# Altium PCB DaughterBoards.PcbDoc (part 2 of 4)
Units mil, origin at the board's own origin, x right, y up, seen from the top; angles counter-clockwise.
Board outline 8080.87 x 6506.06 mil, 4 copper layers (Top Layer, Top, Mid-Layer 1, GND, Mid-Layer 2, VCC, Bottom Layer, Bottom), stack 18.2 mil thick; 508 components, 296 nets, 1635 pads, 376 vias.
Unrouted connection lines stored in the file: 28.
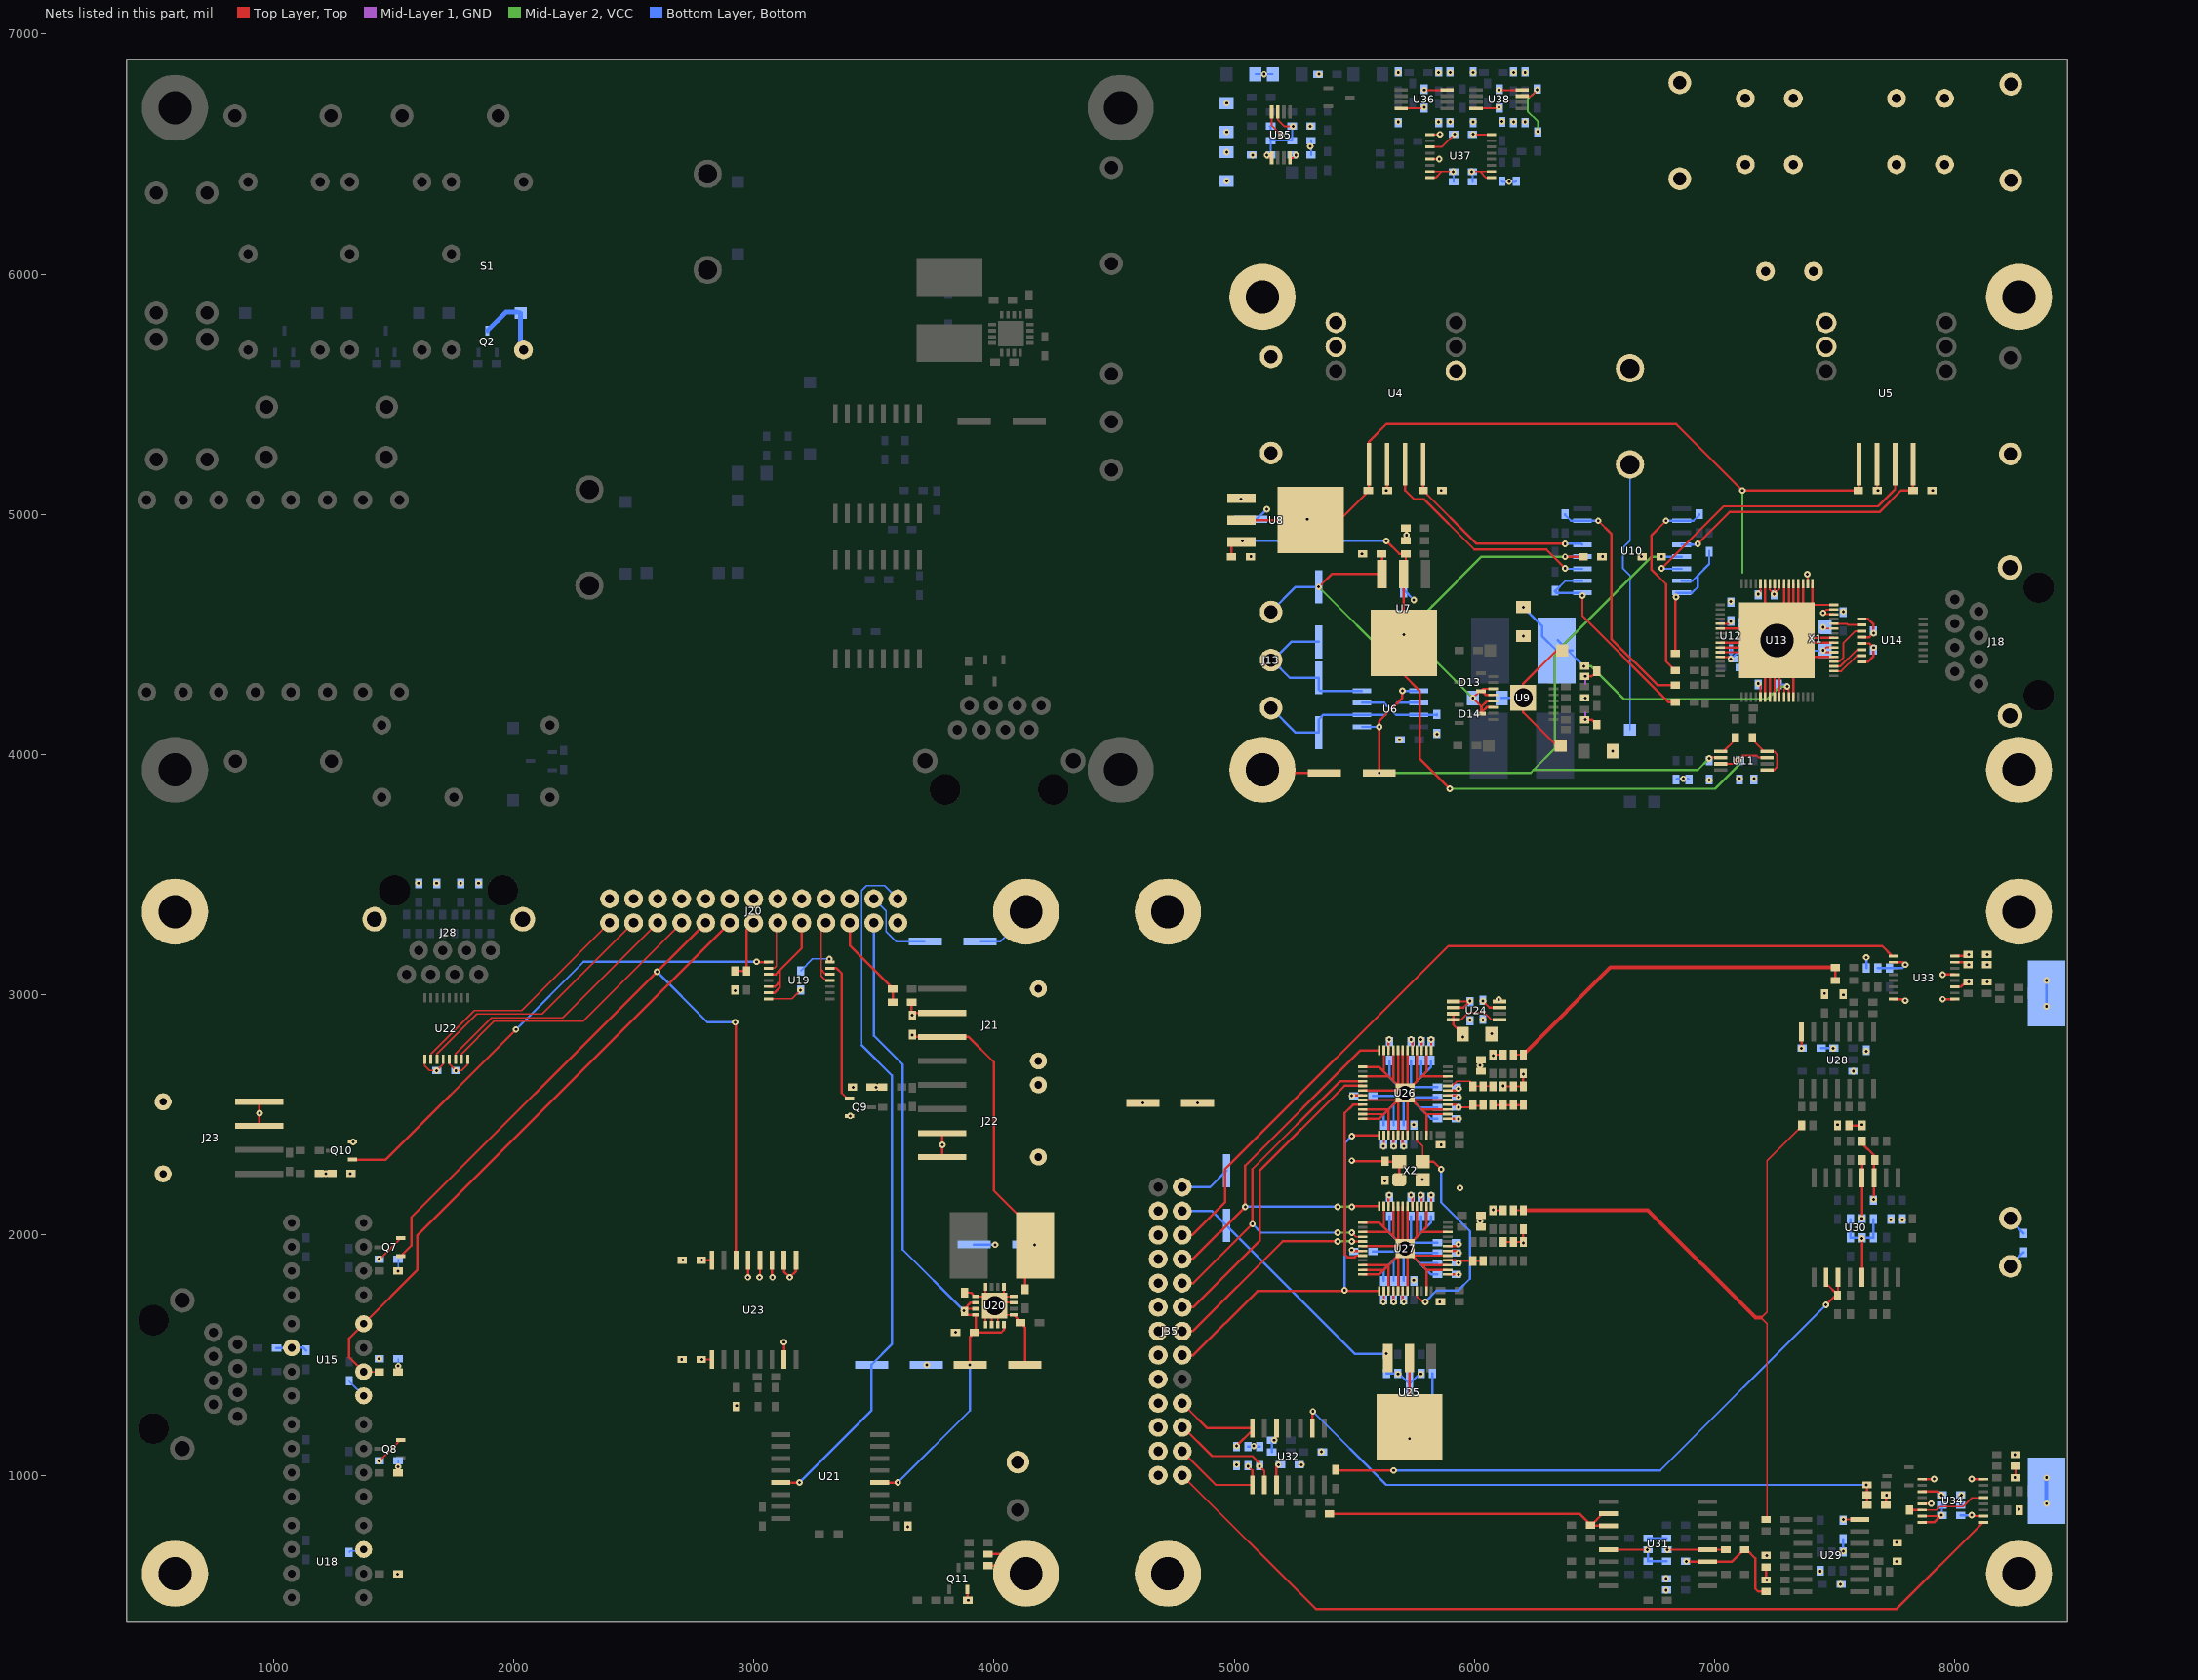
[diagram p4: the nets of this part, all layers, seen from the top]

## Via types
v1: diameter 27.56, hole 11.81, Top Layer, Top to Bottom Layer, Bottom, 373 vias
v2: diameter 98.43, hole 78.74, Top Layer, Top to Bottom Layer, Bottom, 2 vias
v3: diameter 157.48, hole 137.8, Top Layer, Top to Bottom Layer, Bottom, 1 vias

## Nets (pads, with @x,y where several pads share a name; then routed paths per layer and width w, separated by ;. In a path a pad name is that pad's centre, name@x,y a point inside that pad or via, vN(x,y) a via of type N, cw(c..) or ccw(c..) an arc to the next point about the centre after c; other vN are vias at no path point) (continued)
2_3.3V: C30.1 C48.2 C49.2 C55.2 C57.2 L2.1 R29.1 U13.10 U13.11 U13.22 U13.23 U13.30 U13.31 U13.34 U13.40 U13.41 U13.42 U14.1 U14.4 X1.1 X1.4 | length 2196.2
  Top Layer, Top w7.87: U13.42@7230.47,4712.22 7230.47,4685.53 v1(7248,4668) v1@7250.16,4670.16 ; U13.41@7250.16,4712.22 v1@7250.16,4670.16 ; U13.40@7269.84,4712.22 7269.84,4689.84 v1@7250.16,4670.16 ; U13.10@7289.53,4239.78 7289.53,4271.53 v1(7302,4284) 7309.21,4276.79 U13.11@7309.21,4239.78 ; v1(7386,4752) 7387.95,4750.05 U13.34@7387.95,4712.22 ; U13.22@7496.22,4426.79 7459.21,4426.79 v1(7452,4434) 7464.47,4446.47 U13.23@7496.22,4446.47 ; U13.30@7496.22,4584.27 7457.73,4584.27 v1(7452,4590) 7465.95,4603.95 U13.31@7496.22,4603.95
  Top Layer, Top w9.84: v1(6456,4368) R29.1@6459.37,4368 ; U14.4@7612.05,4488.8 7644.8,4488.8 v1(7662,4506) 7662,4542 7638.43,4565.57 U14.1@7612.05,4565.57
  Mid-Layer 2, VCC w9.84: v1(6456,4368) 6486,4368 6624,4230 7218,4230 7272,4284 v1(7302,4284)
  Bottom Layer, Bottom w7.87: C48.2@7248,4665.37 v1(7248,4668) ; C49.2@7266,4292.63 7293.37,4292.63 v1(7302,4284) ; C57.2@7383.37,4380 7383.37,4419.37 7386,4422 X1.1@7384.6,4432.79 7450.79,4432.79 v1(7452,4434) 7453.21,4432.79 X1.4@7459.4,4432.79
  Bottom Layer, Bottom w9.84: v1(6204,4614) 6281.8,4536.2 6281.8,4494 L2.1@6341.8,4434 L2.1@6390,4434 ; L2.1@6348,4476 L2.1@6390,4434 ; L2.1@6408,4434 L2.1@6390,4434 ; v1(6456,4368) L2.1@6390,4434 ; v1(7662,4506) C55.2@7662,4515.37
2_5V: C17.1 C19.1 C29.1 C44.2 C51.2 C52.2 C53.2 C54.2 U4.10 U5.10 U8.2 U8.4 U12.1 U12.2 U13.5 U13.44 U13.53 U13.60 | length 3916.6
  Top Layer, Top w7.87: U13.60@7023.78,4407.1 7058.9,4407.1 v1(7068,4398) ; U13.53@7023.78,4544.9 7058.9,4544.9 v1(7068,4554) ; v1(7182,4296) 7191.1,4286.9 U13.5@7191.1,4239.78 ; v1(7182,4668) 7191.1,4677.1 U13.44@7191.1,4712.22
  Top Layer, Top w9.84: U8.2@5031.17,4976.54 U8.4@5307.46,4976.54 ; v1(5304,4980) U8.4@5307.46,4976.54 ; U4.10@5561.4,5209.42 5561.4,5100.6 C17.1@5562,5100 ; C19.1@7598.63,5100 C19.1@7596,5100 ; U5.10@7601.4,5209.42 7601.4,5105.4 C19.1@7596,5100 ; U8.4@5307.46,4976.54 U8.4@5318.57,4976.54 5360.54,4976.54 5364,4980 5442,4980 5556,5094 C17.1@5558.63,5100 C17.1@5562,5100 ; C17.1@5562,5100 5562,5304 5634,5376 6840,5376 v1(7116,5100) C19.1@7596,5100
  Mid-Layer 2, VCC w7.87: 7116,4758 v1(7116,5100)
  Bottom Layer, Bottom w7.87: v1(7068,4554) C52.2@7068,4556.63 ; C53.2@7182,4665.37 v1(7182,4668)
  Bottom Layer, Bottom w9.84: C29.1@5298.17,4980 v1(5304,4980) ; U12.2@7068,4438.88 v1(7068,4398) ; C54.2@7076.63,4398 v1(7068,4398) ; C44.2@7152,4454.63 7118.63,4454.63 7104,4440 U12.1@7105.4,4438.88 7105.4,4435.4 v1(7068,4398) ; C51.2@7182,4292.63 v1(7182,4296)
2_10V: C25.1 C27.1 C38.1 C42.1 R27.2 U7.2 U7.4 U8.3 U10.4 U11.3 U11.7 | length 4586.8
  Top Layer, Top w7.87: U11.7@7026.07,3961.59 7081.59,3961.59 v1(7098,3978) 7116,3996 7176,3996 7184.82,3987.18 U11.3@7218,3987.18
  Top Layer, Top w9.84: C27.1@4988.63,4824 4988.63,4880.63 4998,4890 U8.3@5031.17,4885.98 v1(5034,4890) ; v1(5634,4890) 5688,4836 R27.2@5714.63,4836 5714.63,4760.63 U7.2@5706,4752 v1(5706,4500) ; v1(5898,3858) 5772,3984 5772,4266 U7.4@5706,4332 ; v1(6378,4824) C38.1@6452.63,4824 ; U7.4@5706,4332 U7.4@5706,4434 ; U7.4@5706,4332 U7.4@5706,4434 ; U7.4@5706,4332 U7.4@5706,4434 ; U7.4@5706,4434 U7.4@5706,4464.6 ; U7.4@5706,4434 U7.4@5706,4464.6 ; U7.4@5706,4464.6 v1(5706,4500) ; U7.4@5706,4464.6 v1(5706,4500)
  Mid-Layer 2, VCC w9.84: v1(5706,4500) 5826,4620 6030,4824 v1(6378,4824) ; v1(5898,3858) 6852,3858 7002,3858 7098,3954 v1(7098,3978)
  Bottom Layer, Bottom w7.87: v1(7098,3978) 7104,3972 C42.1@7104,3975.37
  Bottom Layer, Bottom w9.84: v1(5034,4890) v1(5634,4890) ; C25.1@5706,4493.83 v1(5706,4500) ; v1(6378,4824) U10.4@6450,4824
2_12V: C20.2 C22.1 C33.1 D13.1 D14.3 J13.1 U7.3 U9.3 U9.4 U9.5 U9.6 | length 1842.6
  Top Layer, Top w9.84: v1(5352,4698) 5406,4752 U7.3@5615.45,4752 5615.45,4830.55 5610,4836 C20.2@5613.37,4836 ; D14.3@6030,4170 D14.3@6030,4176 ; U9.6@6078.02,4197.61 6051.61,4197.61 D14.3@6030,4176 ; U9.5@6078.02,4223.2 6053.2,4223.2 6030,4200 D14.3@6030,4176 ; U9.4@6078.02,4248.8 6047.2,4248.8 D13.1@6030,4266 ; U9.3@6078.02,4274.39 6038.39,4274.39 D13.1@6030,4266 ; D14.3@6027.53,4173.53 6027.53,4202.47 v1(5994,4236) 6022.5,4264.5 D13.1@6027.47,4264.5 D13.1@6030,4266 ; D14.3@6027.53,4173.53 D14.3@6030,4176 ; D14.3@6027.53,4173.53 6024,4170 D14.3@6027.53,4170 D14.3@6027.53,4173.53
  Mid-Layer 2, VCC w9.84: v1(5352,4698) 5664,4386 5700,4386 5844,4386 v1(5994,4236)
  Bottom Layer, Bottom w9.84: J13.1@5154,4594 5154,4596 5256.17,4698.17 C22.1@5352,4698.17 v1(5352,4698)
2_25MHZ: U13.27 X1.3 | length 53.7
  Top Layer, Top w7.87: v1(7452,4530) 7456.79,4525.21 U13.27@7496.22,4525.21
  Bottom Layer, Bottom w7.87: v1(7452,4530) X1.3@7459.4,4531.21
2_-5V: C28.2 C39.1 C43.1 U6.1 U6.5 U10.13 U11.6 | length 3198.9
  Top Layer, Top w7.87: v1(6978,3984) 6981.18,3987.18 U11.6@7026.07,3987.18
  Top Layer, Top w9.84: v1(5604,3924) C28.2@5604.17,3924 5604.17,4115.83 v1(5604,4116) 5604,4140 5700,4236 v1(5700,4266) ; C39.1@6777.37,4824 v1(6780,4824)
  Mid-Layer 2, VCC w9.84: v1(5604,3924) 6234,3924 6246,3936 ; v1(6780,4824) 6738,4824 6336,4422 6336,4026 6246,3936 ; v1(6978,3984) 6930,3936 6852,3936 6246,3936
  Bottom Layer, Bottom w7.87: C43.1@6978,3975.37 v1(6978,3984)
  Bottom Layer, Bottom w9.84: U6.1@5532,4116 v1(5604,4116) ; v1(5700,4266) U6.5@5768.22,4266 ; v1(6780,4824) U10.13@6863.39,4824
2_-12V: C21.2 C23.2 J13.3 U6.2 U6.3 U6.6 U6.7 | length 1076.6
  Bottom Layer, Bottom w9.84: J13.3@5154,4194 5256.17,4091.83 C23.2@5352,4091.83 5352,4146 5372,4166 U6.2@5532,4166 5630,4166 5652,4188 ; U6.3@5532,4216 5624,4216 5652,4188 ; U6.6@5768.22,4216 5680,4216 5652,4188 ; C21.2@5844,4167.37 5844,4164 5842,4166 U6.7@5768.22,4166 5674,4166 5652,4188
2_ADC0: U13.20 U14.3 | length 203.6
  Top Layer, Top w7.87: U13.20@7496.22,4387.42 7519.42,4387.42 7536,4404 7536,4464 7586.39,4514.39 U14.3@7612.05,4514.39
2_ADC1: U13.19 U14.6 | length 144.8
  Top Layer, Top w7.87: U13.19@7496.22,4367.73 7523.73,4367.73 7593.61,4437.61 U14.6@7612.05,4437.61
2_ADC2: U13.18 U14.7 | length 142.3
  Top Layer, Top w7.87: U13.18@7496.22,4348.05 7528.05,4348.05 7592.02,4412.02 U14.7@7612.05,4412.02
2_CLK: U13.28 U14.2 | length 117.9
  Top Layer, Top w7.87: U13.28@7496.22,4544.9 7551.1,4544.9 7556.02,4539.98 U14.2@7612.05,4539.98
2_GND: C15.2 C16.2 C17.2 C18.2 C19.2 C20.1 C21.1 C22.2 C23.1 C24.1 C25.2 C26.2 C27.2 C28.1 C29.2 C30.2 C32.2 C33.2 C34.2 C35.2 C37.2 C38.2 C39.2 C40.1 C41.1 C42.2 C43.2 C44.1 C47.1 C48.1 C49.1 C50.1 C51.1 C52.1 C53.1 C54.1 C55.1 C57.1 D11.2 D12.1 D15.1 J11.1 J12.2 J13.2 J14.1 J15.1 J16.1 J17.1 J18.9 J18.10 R28.1 R30.2 R33.2 R42.2 U4.9 U5.9 U6.4 U8.1 U9.17 U12.5 U13.6 U13.7 U13.8 U13.9 U13.12 U13.21 U13.24 U13.25 U13.32 U13.33 U13.35 U13.36 U13.37 U13.38 U13.39 U13.43 U13.54 U13.57 U13.58 U13.59 U13.65 U14.5 U14.8 X1.2 | length 7540.7
  Top Layer, Top w9.84: v1(5028,5064) 5031.09,5067.09 U8.1@5031.17,5067.09 ; C27.2@5067.37,4824 v1(5070,4824) ; J15.1@5118.11,3937.01 5172,3924 C28.1@5375.83,3924 ; v1(5532,4836) C20.1@5534.63,4836 ; U4.9@5636.47,5209.42 5636.47,5102.47 v1(5634,5100) C17.2@5637.37,5100 ; R28.1@5714.63,4890 5718,4893.37 v1(5718,4914) 5718,4940.63 C24.1@5714.63,4944 ; v1(5862,5100) C16.2@5865.37,5100 ; D15.1@6360,4038 6342,4038 6204,4176 U9.17@6204,4236 6204,4296 6342,4434 D12.1@6366,4434 ; R33.2@6459.37,4146 v1(6462,4146) 6488.63,4146 C35.2@6510,4124.63 ; C34.2@6459.37,4236 v1(6462,4236) ; R30.2@6459.37,4326 v1(6462,4326) 6488.63,4326 C32.2@6510,4347.37 ; C38.2@6531.37,4824 v1(6534,4824) ; v1(6696,4824) C39.2@6698.63,4824 ; U13.59@7023.78,4426.79 U13.65@7210.79,4426.79 ; U13.58@7023.78,4446.47 U13.65@7230.47,4446.47 ; U13.57@7023.78,4466.16 U13.65@7250.16,4466.16 ; U13.54@7023.78,4525.21 U13.65@7210.79,4525.21 ; U13.6@7210.79,4239.78 U13.65@7210.79,4426.79 ; U13.43@7210.79,4712.22 U13.65@7210.79,4525.21 ; U13.7@7230.47,4239.78 U13.65@7230.47,4446.47 ; U13.8@7250.16,4239.78 U13.65@7250.16,4466.16 ; U13.9@7269.84,4239.78 U13.65@7269.84,4466.16 ; U13.39@7289.53,4712.22 U13.65@7289.53,4505.53 ; U13.38@7309.21,4712.22 U13.65@7309.21,4525.21 ; U13.12@7328.9,4239.78 U13.65@7328.9,4407.1 ; U13.37@7328.9,4712.22 U13.65@7328.9,4544.9 ; U13.36@7348.58,4712.22 U13.65@7348.58,4564.58 ; U13.35@7368.27,4712.22 U13.65@7368.27,4584.27 ; U13.33@7407.64,4712.22 U13.65@7407.64,4623.64 ; U13.21@7496.22,4407.1 U13.65@7328.9,4407.1 ; U13.24@7496.22,4466.16 U13.65@7269.84,4466.16 ; U13.25@7496.22,4485.84 U13.65@7269.84,4485.84 ; U13.32@7496.22,4623.64 U13.65@7407.64,4623.64 ; U14.8@7612.05,4386.43 7638.43,4386.43 7662,4410 v1(7662,4446) 7644.8,4463.2 U14.5@7612.05,4463.2 ; U5.9@7676.47,5209.42 7676.47,5103.53 v1(7680,5100) C19.2@7677.37,5100 ; C18.2@7905.37,5100 v1(7908,5100) ; U13.65@7210.79,4426.79 U13.65@7230.47,4446.47 ; U13.65@7210.79,4525.21 v3(7260,4476) ; U13.65@7230.47,4446.47 U13.65@7250.16,4466.16 ; U13.65@7250.16,4466.16 v3(7260,4476) ; v3(7260,4476) U13.65@7269.84,4466.16 ; v3(7260,4476) U13.65@7269.84,4485.84 ; U13.65@7269.84,4466.16 U13.65@7328.9,4407.1 ; U13.65@7269.84,4485.84 U13.65@7289.53,4505.53 ; U13.65@7289.53,4505.53 U13.65@7309.21,4525.21 ; U13.65@7309.21,4525.21 U13.65@7328.9,4544.9 ; U13.65@7328.9,4544.9 U13.65@7348.58,4564.58 ; U13.65@7348.58,4564.58 U13.65@7368.27,4584.27 ; U13.65@7368.27,4584.27 U13.65@7407.64,4623.64
  Mid-Layer 1, GND w9.84: v1(6462,4146) 6462,4176 ; 6462,4296 v1(6462,4326)
  Bottom Layer, Bottom w7.87: C41.1@6840,3896.63 6843.37,3900 v1(6870,3900) 6890.63,3900 R42.2@6894,3896.63 ; v1(6978,3894) C43.2@6978,3896.63 ; C52.1@7068,4635.37 v1(7068,4638) ; C42.2@7104,3896.63 v1(7104,3900) ; U12.5@7105.4,4549.12 7138.88,4549.12 C44.1@7152,4536 ; C47.1@7107.37,4362 7146,4362 C51.1@7170,4386 ; C44.1@7152,4533.37 C44.1@7152,4536 ; C54.1@7155.37,4398 7158,4398 C51.1@7170,4386 ; C40.1@7164,3896.63 v1(7164,3900) ; C51.1@7182,4371.37 7182,4386 7176,4392 ; C53.1@7182,4586.63 7182,4554 7200,4536 ; C48.1@7248,4586.63 v3@7248,4488 ; C49.1@7266,4371.37 v3@7266,4418.63 ; C57.1@7304.63,4380 v3@7266,4418.63 ; X1.2@7384.6,4531.21 7315.21,4531.21 v3(7260,4476) ; C50.1@7536,4593.37 v1(7536,4596) ; C44.1@7152,4536 7200,4536 ; C51.1@7170,4386 7176,4392 ; 7176,4392 v3(7260,4476) ; 7200,4536 v3@7248,4488 ; v3@7248,4488 v3(7260,4476) ; v3(7260,4476) 7266,4470 v3@7266,4418.63 ; v3(7260,4476) 7260,4424.63 v3@7266,4418.63
  Bottom Layer, Bottom w9.84: C29.2@5069.83,4980 5094,4980 v1(5136,5022) ; J13.2@5154,4386 J13.2@5160,4392 ; J13.2@5154,4394 J13.2@5160,4392 ; C22.2@5352,4469.83 5237.83,4469.83 J13.2@5160,4392 ; U6.4@5532,4266 5358,4266 5352,4272 C23.1@5352,4320.17 5231.83,4320.17 J13.2@5160,4392 ; v1(5688,4062) C26.2@5690.63,4062 ; C25.2@5706,4722.17 5706,4686 v1(5748,4644) ; v1(5844,4086) C21.1@5844,4088.63 ; C33.2@6114,4236 U9.17@6204,4236 ; C55.1@7662,4436.63 v1(7662,4446)
  other v1: 6576,4014 6204,4494
2_I1+: R35.2 R43.2 U10.1 U10.2 | length 883.1
  Top Layer, Top w9.84: v1(6450,4662) 6450,4578 6810,4218 R43.2@6836.63,4218
  Bottom Layer, Bottom w9.84: R35.2@6336,4682.63 R35.2@6336,4680 ; v1(6450,4662) U10.1@6450,4674 6342,4674 R35.2@6336,4680 ; U10.2@6450,4724 6380,4724 R35.2@6336,4680
2_I1-: R36.1 R44.2 U10.7 | length 1011.8
  Top Layer, Top w9.84: v1(6516,4974) 6570,4920 6570,4482 6762,4290 R44.2@6836.63,4290
  Bottom Layer, Bottom w9.84: R36.1@6378,5001.37 6378,4998 6402,4974 U10.7@6450,4974 v1(6516,4974)
2_I2+: R38.2 R47.2 U10.15 U10.16 | length 598.9
  Top Layer, Top w9.84: R47.2@6836.63,4422 6836.63,4652.63 v1(6840,4656)
  Bottom Layer, Bottom w9.84: v1(6840,4656) 6840,4674 U10.16@6863.39,4674 6906,4674 6930,4698 6930,4746 ; U10.15@6863.39,4724 6908,4724 6930,4746 ; R38.2@6978,4848 R38.2@6978,4844.63 6978,4794 6930,4746
2_I2-: R39.1 R48.2 U10.10 | length 841
  Top Layer, Top w9.84: v1(6798,4974) 6738,4914 6738,4770 6798,4710 6798,4388.63 R48.2@6836.63,4350
  Bottom Layer, Bottom w9.84: v1(6798,4974) U10.10@6863.39,4974 6912,4974 6936,4998 R39.1@6936,5001.37
2_LEM1+: U4.8 U10.3 | length 982.6
  Top Layer, Top w9.84: U4.8@5711.53,5209.42 5711.53,5100.47 5748,5064 5790,5064 6000,4854 6300,4854 v1(6378,4776)
  Bottom Layer, Bottom w9.84: v1(6378,4776) 6380,4774 U10.3@6450,4774
2_LEM1-: C16.1 U4.7 U10.5 | length 871.2
  Top Layer, Top w9.84: U4.7@5786.6,5209.42 5786.6,5103.4 5790,5100 C16.1@5786.63,5100 6008.63,4878 v1(6378,4878)
  Bottom Layer, Bottom w9.84: v1(6378,4878) 6446,4878 U10.5@6450,4874
2_LEM2+: U5.8 U10.14 | length 1296.1
  Top Layer, Top w9.84: v1(6780,4776) 7038,5034 7680,5034 7751.53,5105.53 U5.8@7751.53,5209.42
  Bottom Layer, Bottom w9.84: v1(6780,4776) 6782,4774 U10.14@6863.39,4774
2_LEM2-: C18.1 U5.7 U10.12 | length 1171.1
  Top Layer, Top w9.84: v1(6930,4878) 7062,5010 7686,5010 7776,5100 C18.1@7826.63,5100 7830,5100 7826.6,5103.4 U5.7@7826.6,5209.42
  Bottom Layer, Bottom w9.84: U10.12@6863.39,4874 6926,4874 v1(6930,4878)
2_V1: C15.1 D11.1 R40.2 U4.6 U5.2 U5.3 | length 1128.9
  Bottom Layer, Bottom w7.87: R40.2@6648,4104 6648,4746 6618,4776 6618,4860 6648,4890 C15.1@6648,5208
2_V1+: R45.2 U11.5 | length 89
  Top Layer, Top w7.87: U11.5@7026.07,4012.77 7036.77,4012.77 7086,4062 R45.2@7086,4070.63
2_V1-: R46.2 U11.1 U11.4 | length 236.5
  Top Layer, Top w7.87: R46.2@7158,4070.63 7158,4062 7207.23,4012.77 U11.4@7218,4012.77 7249.23,4012.77 7260,4002 7260,3948 7248,3936 U11.1@7218,3936
3_3.3V: C58.1 C59.1 C60.1 C62.1 C63.1 C66.1 C67.1 C78.1 J20.3 R59.1 R60.1 R61.1 R62.1 R66.1 R68.1 U19.14 U22.13 U22.16 | length 894.3
  Top Layer, Top w5.98: R61.1@1519.37,1010 1520,1010.63 v1(1520,1035) ; R60.1@1519.37,1430 1520,1430.63 v1(1520,1455) ; R59.1@1519.37,1850 v1(1520,1850) ; U22.13@1732.8,2732.05 1732.8,2712.2 v1(1760,2685) 1785,2685 1809.57,2709.57 U22.16@1809.57,2732.05 ; v1(3315,3150) 3317.95,3147.05 U19.14@3317.95,3136.77
  Top Layer, Top w9.84: R68.1@1191.37,2256 v1(1218,2256) C66.1@1244.63,2256 ; v1(1518,588) 1518,588.63 R62.1@1519.37,590 ; C67.1@3489.37,2616 v1(3510,2616) R66.1@3536.63,2616
  Bottom Layer, Bottom w5.98: C59.1@1519.37,1060 1520,1059.37 v1(1520,1035) ; C58.1@1519.37,1485 1520,1484.37 v1(1520,1455) ; C60.1@1519.37,1900 1520,1899.37 v1(1520,1850) ; C78.1@1759.37,2685 v1(1760,2685) ; C63.1@3195,3099.37 3195,3100 3245,3150 v1(3315,3150) ; J20.3@3500,3400 3550,3350 3550,3265 3593,3222 C62.1@3713.83,3222
3_5V: C65.1 C71.1 C81.2 C82.2 J21.3 L4.2 R71.2 U23.1 U23.11 U23.13 U23.16 | length 1682.3
  Top Layer, Top w9.84: C82.2@2781.37,1482 v1(2784,1482) U23.1@2826,1482 ; C81.2@2781.37,1896 v1(2784,1896) 2784.61,1895.39 U23.16@2826,1895.39 ; v1(2976,1824) U23.13@2976,1895.39 ; U23.11@3076,1895.39 3076,1826 v1(3078,1824) ; C65.1@3660,2834.63 v1(3660,2832) 3667,2825 J21.3@3785,2825 3895,2825 4000,2720 4000,2185 4170,2015 v1(4170,1960) ; R71.2@4130,1774.37 4130,1920 v1(4170,1960) ; L4.2@4171.13,1957.93 v1(4170,1960)
  Bottom Layer, Bottom w9.84: C71.1@4145.17,1961 4169,1961 v1(4170,1960)
3_12V: C64.1 C68.2 C69.2 J20.4 U20.2 U20.3 U20.4 U20.8 U21.4 | length 3018.2
  Top Layer, Top w5.98: v1(3875,1685) C69.2@3878,1681.63
  Top Layer, Top w9.84: U21.4@3525,970 v1(3600,970) ; C69.2@3875,1670 C69.2@3875,1675 ; C69.2@3878,1681.63 C69.2@3876.56,1678.44 ; v1(3900,1460) C64.1@3900.83,1460 3900.83,1575.83 C68.2@3920,1595 ; C68.2@3919.37,1595 C68.2@3920,1595 ; U20.3@3924.5,1693.39 C69.2@3878.39,1693.39 ; U20.2@3924.5,1718.98 3903.98,1718.98 C69.2@3878.39,1693.39 ; U20.8@4041.63,1627.44 4041.63,1606.63 4030,1595 C68.2@3925,1595 ; C69.2@3875,1675 C69.2@3876.56,1678.44 ; C69.2@3875,1675 C69.2@3875,1680 ; C69.2@3875,1680 v1(3875,1685) 3875,1690 C69.2@3878.39,1693.39 ; C69.2@3875,1680 C69.2@3876.56,1678.44 ; C69.2@3876.56,1678.44 3887.2,1667.8 U20.4@3924.5,1667.8 3924.5,1595.5 C68.2@3925,1595 ; C68.2@3920,1595 C68.2@3925,1595
  Bottom Layer, Bottom w9.84: J20.4@3500,3300 3500,2830 3620,2710 3620,1940 v1(3875,1685) ; v1(3600,970) 3900,1270 v1(3900,1460)
3_-12V: C61.2 J20.1 U21.13 | length 2936.9
  Top Layer, Top w9.84: U21.13@3111.61,970 v1(3190,970)
  Bottom Layer, Bottom w5.98: 3450,2790 3450,3435 3470,3455 3545,3455 J20.1@3600,3400
  Bottom Layer, Bottom w9.84: v1(3190,970) 3490.83,1270.83 C61.2@3490.83,1460 3490,1460 3575,1545 3575,2665 3450,2790
3_ADC0_0: J20.24 U22.11 | length 1067.1
  Top Layer, Top w5.98: U22.11@1681.61,2732.05 1681.61,2755 1846.61,2920 2120,2920 J20.24@2500,3300
3_ADC0_1: J20.22 U22.14 | length 1090.3
  Top Layer, Top w5.98: U22.14@1758.39,2732.05 1758.39,2755 1908.39,2905 2205,2905 J20.22@2600,3300
3_ADC0_2: J20.20 U22.15 | length 1164.7
  Top Layer, Top w5.98: U22.15@1783.98,2732.05 1783.98,2755 1918.98,2890 2290,2890 J20.20@2700,3300
3_ADC0_CLK: J20.26 U22.10 | length 992.7
  Top Layer, Top w5.98: U22.10@1656.02,2732.05 1656.02,2755 1836.02,2935 2035,2935 J20.26@2400,3300
3_FULLBRIDGE: J20.12 U19.2 | length 218.7
  Top Layer, Top w5.98: U19.2@3062.05,3111.18 3086.18,3111.18 3095,3120 3095,3295 J20.12@3100,3300
3_GND: C58.2 C59.2 C60.2 C61.1 C62.2 C63.2 C64.2 C65.2 C66.2 C67.2 C68.1 C69.1 C71.2 C72.2 C73.2 C74.2 C75.2 C76.2 C77.2 C78.2 C80.2 C81.1 C82.1 J20.2 J20.5 J20.7 J20.9 J20.11 J20.13 J20.15 J20.17 J20.19 J20.21 J20.23 J20.25 J21.2 J21.5 J21.6 J22.3 J22.4 J22.5 J22.6 J23.3 J23.4 J23.5 J23.6 J24.1 J25.1 J26.1 J27.1 J28.9 J28.10 J29.2 Q7.2 Q8.2 Q9.2 Q10.2 Q11.2 R55.1 R58.1 R70.1 R72.1 R77.1 R85.1 R199.1 U15.5 U18.3 U19.7 U20.1 U20.5 U20.6 U20.7 U20.9 U20.11 U20.12 U20.13 U20.16 U20.17 U22.9 U22.12 U23.7 U23.9 U23.10 U23.12 | length 3074
  Top Layer, Top w5.98: v1(1440,1060) 1442.97,1060 Q8.2@1530.47,1147.5 ; v1(1440,1900) 1442.97,1900 Q7.2@1530.47,1987.5 ; U22.9@1630.43,2732.05 1630.43,2704.57 1650,2685 v1(1680,2685) 1707.2,2712.2 U22.12@1707.2,2732.05 ; U19.7@3062.05,2983.23 3158.23,2983.23 v1(3195,3020)
  Top Layer, Top w7.87: U20.1@3924.5,1744.57 U20.17@3964.86,1744.57 ; U20.5@3964.86,1627.44 3964.86,1667.8 U20.17@3990.45,1693.39 ; U20.16@3964.86,1784.92 U20.17@3964.86,1744.57 ; U20.6@3990.45,1627.44 U20.17@3990.45,1693.39 ; U20.7@4016.04,1627.44 U20.17@4016.04,1693.39 ; U20.13@4041.63,1784.92 U20.17@4041.63,1744.57 ; U20.9@4081.98,1667.8 4041.63,1667.8 U20.17@4016.04,1693.39 ; U20.11@4081.98,1718.98 U20.17@4016.04,1718.98 ; U20.12@4081.98,1744.57 U20.17@4041.63,1744.57 ; U20.17@3964.86,1744.57 v2(4003.24,1706.18) ; U20.17@3990.45,1693.39 v2(4003.24,1706.18) ; v2(4003.24,1706.18) U20.17@4016.04,1718.98 ; v2(4003.24,1706.18) U20.17@4016.04,1693.39 ; U20.17@4016.04,1718.98 U20.17@4041.63,1744.57
  Top Layer, Top w9.84: J23.3@940.98,2455 940.98,2506.98 v1(942,2508) 940.98,2509.02 J23.4@940.98,2555 ; v1(1320,2256) C66.2@1323.37,2256 ; Q10.2@1329.47,2389.5 1330.5,2389.5 v1(1332,2388) ; v1(2700,1482) C82.1@2702.63,1482 ; C81.1@2702.63,1896 v1(2706,1896) ; v1(2922,3018) R199.1@2922,3020.63 ; C80.2@2928,1286.63 v1(2928,1290) ; v1(3024,1824) 3026,1826 U23.12@3026,1895.39 ; U23.7@3126,1482 v1(3126,1554) ; U23.10@3126,1895.39 3126,1848 v1(3150,1824) 3176,1850 U23.9@3176,1895.39 ; Q9.2@3398.53,2494.5 3400.5,2494.5 v1(3402,2496) ; C67.2@3410.63,2616 v1(3414,2616) ; v1(3642,786) R85.1@3642,788.63 ; R70.1@3657.37,2970 3657.37,2918.63 v1(3660,2916) ; C65.2@3660,2913.37 v1(3660,2916) ; J22.4@3785,2325 3785,2375 v1(3786,2376) 3785,2377 J22.3@3785,2425 ; J21.2@3785,2925 3669,2925 v1(3660,2916) ; v1(3840,1595) C68.1@3840.63,1595 ; C69.1@3878,1760.37 3904.63,1760.37 3920,1745 U20.1@3924.5,1744.57 ; Q11.2@3889.5,524.53 3889.5,484.5 v1(3894,480) C73.2@3891.37,480 ; C75.2@3975.37,624 J27.1@4092,624 ; R77.1@3975.37,672 4044,672 J27.1@4092,624 ; U20.9@4081.98,1667.8 4082.2,1667.8 4110,1640 R72.1@4110.63,1635 4110,1635 4129.17,1615.83 C64.2@4129.17,1460 ; J27.1@4133.86,590.55 4110,606 J27.1@4092,624
  Bottom Layer, Bottom w5.98: R58.1@1315,679.37 1320.63,685 1375,685 U18.3@1375.83,690 ; R55.1@1316,1393.63 1320,1385 1322,1385 U15.5@1376,1331 ; v1(1440,1060) C59.2@1440.63,1060 ; v1(1440,1485) C58.2@1440.63,1485 ; v1(1440,1900) C60.2@1440.63,1900 ; C77.2@1605,3464.37 v1(1605,3465) ; v1(1680,2685) C78.2@1680.63,2685 ; C76.2@1680,3464.37 v1(1680,3465) ; C74.2@1780,3464.37 v1(1780,3465) ; C72.2@1855,3464.37 v1(1855,3465) ; v1(3195,3020) C63.2@3195,3020.63 ; C62.2@3942.17,3222 4027,3222 4110,3305 J26.1@4133.86,3346.46 ; U18.3@1375.83,690 1375,690 U18.3@1376,691 U18.3@1375.83,690
  Bottom Layer, Bottom w9.84: v1(1320,2256) v1@1326,2256 ; C61.1@3719.17,1460 v1(3720,1460) ; C71.2@3916.83,1961 4004,1961 v1(4005,1960)
3_RX: J20.6 R65.1 R70.2 | length 407.2
  Top Layer, Top w9.84: J20.6@3400,3300 3400,3206 3576,3030 R65.1@3578.63,3024 3576,3024 3578.63,3021.37 R70.2@3578.63,2970
3_S1: Q10.1 U19.1 | length 2074.2
  Top Layer, Top w9.84: Q10.1@1329.47,2314.5 1468.5,2314.5 v1(2010,2856) ; v1(3012,3138) 3013.23,3136.77 U19.1@3062.05,3136.77
  Bottom Layer, Bottom w9.84: v1(2010,2856) 2292,3138 v1(3012,3138)
3_SOFTSTART: J20.10 U19.3 U19.5 U19.6 | length 521.8
  Top Layer, Top w5.98: U19.3@3062.05,3085.59 3090.59,3085.59
  Top Layer, Top w9.84: U19.6@3062.05,3008.82 3086.82,3008.82 3108,3030 3108,3054 ; U19.5@3062.05,3034.41 3088.41,3034.41 3108,3054 ; U19.3@3062.05,3085.59 3090.59,3085.59 ; J20.10@3200,3300 3200,3195 3090.59,3085.59 ; 3090.59,3085.59 3091.59,3085.59 3108,3102 3108,3054
3_TX: J20.8 U19.11 U19.12 | length 320.5
  Top Layer, Top w5.98: J20.8@3300,3300 3280,3280 3280,3105 ; U19.11@3317.95,3060 3300,3060 3280,3080 3280,3105 ; U19.12@3317.95,3085.59 3299.41,3085.59 3280,3105
3_USB: Q9.1 U19.13 | length 596.7
  Top Layer, Top w9.84: U19.13@3317.95,3111.18 3344.82,3111.18 3366,3090 3366,2592 3388.5,2569.5 Q9.1@3398.53,2569.5
3_VBUS: J20.16 R60.2 U15.6 U15.8 | length 2615.5
  Top Layer, Top w5.98: U15.6@1376,1431 1390,1430 R60.2@1440.63,1430
  Top Layer, Top w9.84: U15.6@1376,1431 1315,1492 1315,1570 U15.8@1376,1631 1600,1855 1600,2000 J20.16@2900,3300
3_VCLK: J20.18 Q7.1 U23.14 | length 3318
  Top Layer, Top w9.84: Q7.1@1530.47,1912.5 1575,1957.03 1575,2075 v1@2597,3097 ; v1(2598,3096) v1@2597,3097 ; J20.18@2800,3300 v1@2597,3097 ; v1(2922,2886) 2926,2882 U23.14@2926,1895.39
  Bottom Layer, Bottom w9.84: v1(2598,3096) 2808,2886 v1(2922,2886)
3_VREF: J20.14 R198.1 R199.2 | length 262.1
  Top Layer, Top w9.84: R199.2@2922,3099.37 2967.37,3099.37 R198.1@2970,3102 ; R198.1@2970,3099.37 R198.1@2970,3102 ; J20.14@3000,3300 2970,3270 R198.1@2970,3102
4_1.8V: C88.2 C90.2 C91.2 C92.2 C93.2 C94.2 C95.2 C96.2 C97.2 C98.2 C99.2 C100.2 C102.2 C103.2 C104.2 C105.2 C106.2 C107.2 C108.2 C109.2 C110.2 C111.2 C112.2 C114.2 C115.2 C117.2 C118.2 R96.2 R97.2 R98.2 R99.2 R100.2 R101.2 R102.2 R103.2 U24.1 U24.7 U24.8 U26.2 U26.4 U26.6 U26.13 U26.16 U26.18 U26.19 U26.25 U26.27 U26.29 U26.34 U27.2 U27.4 U27.6 U27.13 U27.16 U27.18 U27.19 U27.25 U27.27 U27.29 U27.34 | length 1899.3
  Top Layer, Top w6: U24.8@5912.84,2895.91 5927.72,2896.17 5945.72,2896.17 5975.72,2926.17 6041.72,2926.17 6071.98,2895.91 U24.1@6104.77,2895.91 ; R100.2@6078,2103.37 v1(6078,2106)
  Top Layer, Top w9.84: v1(5622,1722) 5623.42,1723.42 U27.2@5623.42,1766.83 ; v1(5622,2370) 5623.42,2371.42 U26.2@5623.42,2414.83 ; U27.34@5643.1,2121.17 5643.1,2163.1 v1(5646,2166) ; U26.34@5643.1,2769.17 5643.1,2811.1 v1(5646,2814) ; U27.4@5662.79,1766.83 5662.79,1723.21 v1(5664,1722) ; U26.4@5662.79,2414.83 5662.79,2371.21 v1(5664,2370) ; U27.6@5702.16,1766.83 5702.16,1725.84 v1(5706,1722) ; U26.6@5702.16,2414.83 5702.16,2373.84 v1(5706,2370) ; v1(5736,2166) 5741.53,2160.47 U27.29@5741.53,2121.17 ; v1(5736,2814) 5741.53,2808.47 U26.29@5741.53,2769.17 ; v1(5778,2166) 5780.9,2163.1 U27.27@5780.9,2121.17 ; v1(5778,2814) 5780.9,2811.1 U26.27@5780.9,2769.17 ; v1(5820,2166) 5820.27,2165.73 U27.25@5820.27,2121.17 ; v1(5820,2814) 5820.27,2813.73 U26.25@5820.27,2769.17 ; v1(5856,1722) C117.2@5858.63,1722 ; C114.2@5858.63,2376 v1(5862,2376) ; U27.13@5889.17,1835.73 5933.73,1835.73 v1(5934,1836) ; U27.16@5889.17,1894.79 5923.21,1894.79 v1(5934,1884) 5942.63,1892.63 R102.2@5994,1892.63 R103.2@6036,1892.63 ; U27.18@5889.17,1934.16 5925.84,1934.16 v1(5934,1926) ; U27.19@5889.17,1953.84 5925.84,1953.84 v1(5934,1962) ; U26.13@5889.17,2483.73 5933.73,2483.73 v1(5934,2484) ; U26.16@5889.17,2542.79 5923.21,2542.79 v1(5934,2532) 5985.37,2532 R99.2@5994,2540.63 5994,2538 6033.37,2538 R98.2@6036,2540.63 ; U26.18@5889.17,2582.16 5925.84,2582.16 v1(5934,2574) ; U26.19@5889.17,2601.84 5925.84,2601.84 v1(5934,2610) ; U24.7@5912.84,2921.5 5912.84,2899.05 5915.72,2896.17 U24.8@5912.84,2895.91 5912.84,2875.05 C88.2@5951.72,2836.17 ; C88.2@5951.72,2818.17 v1(5951.72,2824.17) C88.2@5951.72,2836.17 ; C88.2@5951.72,2848.17 C88.2@5951.72,2836.17 ; v1(6078,2106) 6080.63,2103.37 R101.2@6120,2103.37 ; v1(6078,2748) R97.2@6078,2751.37 6117.37,2751.37 6120,2754 R96.2@6120,2751.37
  Bottom Layer, Bottom w9.84: v1(5622,1722) C108.2@5622,1730.63 ; v1(5622,2370) C96.2@5622,2378.63 ; C112.2@5646,2157.37 v1(5646,2166) ; C100.2@5646,2805.37 v1(5646,2814) ; v1(5664,1722) C111.2@5664,1730.63 ; v1(5664,2370) C93.2@5664,2378.63 ; v1(5706,1722) C102.2@5706,1730.63 ; v1(5706,2370) C95.2@5706,2378.63 ; C105.2@5736,2157.37 v1(5736,2166) ; C92.2@5736,2805.37 v1(5736,2814) ; C118.2@5748,1809.37 v1(5748,1812) ; C115.2@5748,2457.37 v1(5748,2460) ; C104.2@5778,2157.37 v1(5778,2166) ; C91.2@5778,2805.37 v1(5778,2814) ; C103.2@5820,2157.37 v1(5820,2166) ; C90.2@5820,2805.37 v1(5820,2814) ; C107.2@5925.37,1836 v1(5934,1836) ; C109.2@5925.37,1884 v1(5934,1884) ; C106.2@5925.37,1926 v1(5934,1926) ; C94.2@5925.37,2484 v1(5934,2484) ; C99.2@5925.37,2532 v1(5934,2532) ; C98.2@5925.37,2574 v1(5934,2574) ; C97.2@5925.37,2616 v1(5934,2610) ; v1(5934,1962) C110.2@5925.37,1968 C110.2@5934,1968
4_3.3V: C83.2 C84.2 C89.2 C101.2 C119.2 C160.1 J35.3 R154.2 R155.2 R156.2 U24.3 U24.5 U24.6 U26.43 U27.43 X2.1 X2.4 | length 680.9
  Top Layer, Top w9.84: v1(4848,2550) C160.1@4848.17,2550 ; v1(5490,1938) 5492.16,1934.16 U27.43@5534.83,1934.16 ; v1(5490,2310) 5492.63,2307.37 C119.2@5628,2307.37 5634,2298 5641.4,2305.4 X2.4@5686.79,2305.4 5688,2292 5686.79,2290.79 X2.1@5686.79,2230.6 ; v1(5490,2580) 5492.16,2582.16 U26.43@5534.83,2582.16 ; U24.6@5912.84,2947.09 5954.63,2947.09 v1@5980.22,2972.68 ; U24.5@5912.84,2972.68 v1@5980.22,2972.68 ; v1(5981.72,2974.17) v1@5980.22,2972.68 ; v1(6035.72,2974.17) 6062.8,2947.09 U24.3@6104.77,2947.09
  Bottom Layer, Bottom w9.84: R156.2@5010,1040.63 v1(5010,1044) ; R154.2@5058,1119.37 5079.37,1119.37 v1(5082,1122) 5084.63,1119.37 R155.2@5106,1119.37 ; v1(5490,1938) C101.2@5498.63,1932 ; v1(5490,2580) C89.2@5498.63,2580 ; C83.2@5981.72,2971.54 v1(5981.72,2974.17) ; v1(6035.72,2974.17) C84.2@6035.72,2977.54
4_10V: C87.1 C132.2 C135.2 C157.1 C161.2 C162.2 C163.2 C166.1 C167.1 C168.1 C171.2 C189.2 C190.2 J34.2 R90.2 R114.2 R117.2 R122.2 R123.2 R124.2 R125.2 R126.2 R127.2 R130.2 R132.2 R136.2 R138.2 R152.2 R161.2 R163.2 U25.2 U25.4 U30.4 U31.4 U32.3 U33.11 U33.15 U33.16 U34.11 U34.15 U34.16 | length 2475.4
  Top Layer, Top w9.84: U32.3@5176,960 5176,1036 v1(5184,1044) ; U25.2@5730,1488 U25.4@5730,1230 ; U25.4@5760,1110 U25.4@5730,1140 ; v1(6804,690) U31.4@6972,690 R132.2@7046.63,690 ; R125.2@7214.63,564 v1(7218,564) 7214.63,567.37 R127.2@7214.63,618 ; R122.2@7458,3003.37 v1(7458,3006) ; R126.2@7560,2456.63 7610.63,2456.63 v1(7614,2460) R124.2@7614,2456.63 ; v1(7614,2070) U30.4@7614,2238 R130.2@7614,2312.63 ; v1(7758,720) R123.2@7761.37,720 ; U34.16@7864.05,804.43 7914.43,804.43 v1@7940.02,830.02 ; U34.15@7864.05,830.02 v1@7940.02,830.02 ; U34.11@7864.05,932.39 7929.61,932.39 v1(7944,918) ; v1(7944,834) v1@7940.02,830.02 ; U33.11@7999.95,3033.61 8025.61,3033.61 8046,3054 C167.1@8054.63,3054 v1(8058,3054) ; U33.15@7999.95,3135.98 8054.02,3135.98 8058,3132 8054.63,3128.63 C166.1@8054.63,3126 v1(8058,3126) ; U33.16@7999.95,3161.57 8000.39,3162 8052,3162 C168.1@8054.63,3168 v1(8058,3168) ; v1(8250,1086) R163.2@8253.37,1086 ; U25.4@5730,1110 U25.4@5730,1140 ; U25.4@5730,1110 U25.4@5730,1140 ; U25.4@5730,1110 U25.4@5730,1140 ; U25.4@5730,1140 v1(5730,1152) ; U25.4@5730,1140 v1(5730,1152) ; U25.4@5730,1140 v1(5730,1152) ; U25.4@5730,1140 v1(5730,1152) ; v1(5730,1152) U25.4@5730,1200.6 ; v1(5730,1152) U25.4@5730,1200.6 ; U25.4@5730,1200.6 U25.4@5730,1230 ; U25.4@5730,1200.6 U25.4@5730,1230
  Bottom Layer, Bottom w9.84: v1(5184,1044) C157.1@5192.63,1044 ; v1(5364,1098) R152.2@5367.37,1098 ; C87.1@5730,1104 C87.1@5730,1151.83 v1(5730,1152) ; C87.1@5730,1206 v1(5730,1152) ; R90.2@5826,1424.63 5826,1248 v1(5730,1152) ; v1(6798,522) R138.2@6800.63,522 ; C190.2@6801.37,690 v1(6804,690) ; C132.2@7443.37,2778 v1(7494,2778) R114.2@7496.63,2778 ; R117.2@7536,681.37 v1(7536,684) C135.2@7536,734.63 ; C189.2@7614,2067.37 v1(7614,2070) ; R161.2@7632,3111.37 v1(7632,3156) ; v1(7782,2064) R136.2@7782,2066.63 ; v1(7944,918) C163.2@7946.63,918 ; C162.2@7946.63,834 v1(7944,834) 7946.63,836.63 C161.2@7946.63,876 ; J34.2@8232,2070 8226,2064 8229.37,2064 C171.2@8286,2007.37
4_12V: C85.2 C165.1 J35.4 U25.3 | length 1117.7
  Top Layer, Top w9.84: v1(5634,1506) U25.3@5639.45,1488
  Bottom Layer, Bottom w9.84: J35.4@4783.86,2100 4908,2100 4968,2040 C165.1@4968,2039.83 5501.83,1506 v1(5634,1506) C85.2@5634,1503.37
4_20MHZ: U26.9 U27.9 X2.3 | length 1006.5
  Top Layer, Top w5.98: U27.9@5761.21,1766.83 5761.21,1744.79 5778,1728 5784,1722 v1(5796,1722) ; U26.9@5761.21,2414.83 5761.21,2392.79 5784,2370 5784,2316 X2.3@5785.21,2305.4
  Top Layer, Top w9.84: X2.3@5785.21,2305.4 5830.6,2305.4 v1(5862,2274)
  Bottom Layer, Bottom w9.84: v1(5796,1722) 5844,1770 5934,1770 5982,1818 5982,2016 5862,2136 v1(5862,2274)
4_AMPLITUDE: J35.20 R156.1 U32.14 | length 439.3
  Top Layer, Top w9.84: J35.20@4783.86,1300 4806,1278 4887.78,1196.22 U32.14@5076,1196.22 5076,1188 v1(5010,1122)
  Bottom Layer, Bottom w9.84: R156.1@5010,1119.37 v1(5010,1122)
4_DATA0: J35.12 U26.41 | length 1303.5
  Top Layer, Top w9.84: J35.12@4783.86,1700 4830,1700 5106,1976 5106,2267.53 5460,2621.53 U26.41@5534.83,2621.53
4_DATA1: J35.14 U27.41 | length 906.1
  Top Layer, Top w9.84: J35.14@4783.86,1600 4828,1600 5202,1974 v1(5430,1974) ; v1(5490,1974) 5490.47,1973.53 U27.41@5534.83,1973.53
  Mid-Layer 2, VCC w9.84: v1(5430,1974) v1(5490,1974)
4_DDS0: C120.2 C124.1 C158.1 R108.1 | length 1556.7
  Top Layer, Top w9.84: C120.2@6162,2751.37 6200.63,2751.37 6204,2748 C124.1@6204,2751.37 ; R108.1@7502.63,3060 7500,3060 7502.63,3062.63 C158.1@7502.63,3114 C158.1@7506,3114
  Top Layer, Top w16.38: C124.1@6204,2751.37 6566.63,3114 6630,3114 7500,3114 C158.1@7502.63,3114
4_DDS1: C122.2 C126.1 C129.1 C131.1 | length 2957.7
  Top Layer, Top w5.98: C131.1@7212,816 C131.1@7214.63,816 ; C131.1@7218,816 7218,1632 ; 7218,1680 7218,2310 7362,2454 C129.1@7362,2456.63
  Top Layer, Top w6: C131.1@7214.63,816 C131.1@7218,816 ; 7218,1632 7194,1656 7218,1680
  Top Layer, Top w9.84: C122.2@6162,2103.37 C126.1@6204,2103.37 ; C126.1@6204,2103.37 6210,2100 6206.63,2103.37 C126.1@6204,2103.37
  Top Layer, Top w16.38: C126.1@6204,2103.37 6206.63,2103.37 6722.63,2103.37 7170,1656 7194,1656
4_DET: R109.1 U34.5 U34.14 | length 334
  Top Layer, Top w5.98: U34.14@7864.05,855.61 7923.61,855.61 7938,870 8034,870 8070.8,906.8 U34.5@8119.95,906.8
  Top Layer, Top w9.84: R109.1@7812,855.37 7812,852 7815.61,855.61 U34.14@7864.05,855.61
4_DETECT: J35.22 R155.1 U32.2 | length 485.2
  Top Layer, Top w9.84: J35.22@4783.86,1200 4788,1200 4908,1080 5076,1080 5106,1050 v1(5106,1038) 5126,1018 U32.2@5126,960
  Bottom Layer, Bottom w9.84: v1(5106,1038) R155.1@5106,1040.63
4_ENVELOPE: C159.2 R157.2 R158.1 U32.9 | length 2596.5
  Top Layer, Top w9.84: U32.9@5326,1196.22 5326,1264 v1(5328,1266) ; v1(7632,960) R158.1@7634.63,962.63 ; C159.2@7634.63,876 R157.2@7634.63,918 R158.1@7634.63,960 R158.1@7634.63,962.63 ; R158.1@7638,966 R158.1@7634.63,962.63
  Bottom Layer, Bottom w9.84: v1(5328,1266) 5634,960 v1(7632,960)
4_EXCITE: J35.24 R154.1 U32.1 | length 438.2
  Top Layer, Top w9.84: J35.24@4783.86,1100 4923.86,960 U32.1@5076,960 5076,1020 v1(5058,1038)
  Bottom Layer, Bottom w9.84: v1(5058,1038) R154.1@5058,1040.63
4_FILTER0: C147.2 C154.1 U30.10 U30.11 | length 2562.1
  Top Layer, Top w9.84: C154.1@5424,1023.37 5424,1020 v1(5664,1020) ; v1(7464,1710) 7503.37,1749.37 C147.2@7512,1749.37 C147.2@7512,1752 ; U30.10@7464,1824.61 7464,1800 C147.2@7512,1752 ; U30.11@7514,1824.61 7514,1754 C147.2@7512,1752
  Bottom Layer, Bottom w9.84: v1(5664,1020) 6774,1020 v1(7464,1710)
4_FILTER1: C149.2 C155.1 U31.10 U31.11 | length 1275.5
  Top Layer, Top w9.84: C155.1@5397.37,840 6438,840 6480,798 C149.2@6483.37,792 C149.2@6486,792 ; U31.11@6558.61,790 6488,790 C149.2@6486,792 ; U31.10@6558.61,840 6534,840 C149.2@6486,792
4_GND: C83.1 C84.1 C85.1 C86.1 C87.2 C88.1 C89.1 C90.1 C91.1 C92.1 C93.1 C94.1 C95.1 C96.1 C97.1 C98.1 C99.1 C100.1 C101.1 C102.1 C103.1 C104.1 C105.1 C106.1 C107.1 C108.1 C109.1 C110.1 C111.1 C112.1 C113.2 C116.2 C119.1 C124.2 C125.2 C126.2 C127.2 C132.1 C133.1 C134.1 C135.1 C136.1 C137.1 C138.1 C139.1 C144.1 C145.1 C150.1 C151.1 C152.1 C153.1 C156.1 C157.2 C159.1 C160.2 C161.1 C162.1 C163.1 C164.1 C165.2 C166.2 C167.2 C168.2 C170.1 C171.1 C189.1 C190.1 J30.1 J31.1 J32.1 J33.1 J34.1 J35.2 J35.5 J35.7 J35.9 J35.11 J35.13 J35.15 J35.17 J35.19 J35.21 J35.23 J35.25 J36.2 J38.2 R91.1 R92.2 R94.2 R104.2 R105.2 R106.2 R107.2 R116.1 R119.1 R131.1 R133.1 R137.1 R139.1 R153.1 R157.1 R162.1 R164.1 R166.1 U24.4 U26.3 U26.5 U26.7 U26.11 U26.14 U26.15 U26.17 U26.22 U26.26 U26.28 U26.30 U26.31 U26.32 U26.33 U26.35 U26.37 U26.39 U26.42 U26.44 U26.46 U26.47 U26.48 U26.49 U27.3 U27.5 U27.7 U27.11 U27.14 U27.15 U27.17 U27.22 U27.26 U27.28 U27.30 U27.31 U27.32 U27.33 U27.35 U27.37 U27.39 U27.42 U27.46 U27.47 U27.48 U27.49 U28.14 U29.14 U30.13 U31.13 U32.12 U33.2 U33.8 U33.9 U33.13 U34.2 U34.8 U34.9 U34.13 X2.2 | length 12269.8
  Top Layer, Top w5.98: v1(5784,2232) 5785.21,2230.79 X2.2@5785.21,2230.6
  Top Layer, Top w6: v1(6120,2622) R104.2@6120,2619.37 ; R104.2@6120,2619.37 6114,2622 6116.63,2619.37 R104.2@6120,2619.37
  Top Layer, Top w9.84: C160.2@4619.83,2550 v1(4620,2550) ; v1(5166,1146) 5176,1156 U32.12@5176,1196.22 ; U27.48@5534.83,1835.73 5603.73,1835.73 5623.42,1855.42 ; U27.47@5534.83,1855.42 5623.42,1855.42 ; U27.46@5534.83,1875.1 5643.1,1875.1 ; U27.42@5534.83,1953.84 U27.49@5702.16,1953.84 ; U27.39@5534.83,2012.9 5643.1,2012.9 ; U27.37@5534.83,2052.27 5603.73,2052.27 5623.42,2032.58 ; U26.48@5534.83,2483.73 5603.73,2483.73 5623.42,2503.42 ; U26.47@5534.83,2503.42 5623.42,2503.42 ; U26.46@5534.83,2523.1 5643.1,2523.1 ; U26.44@5534.83,2562.47 U26.49@5682.47,2562.47 ; U26.42@5534.83,2601.84 U26.49@5702.16,2601.84 ; U26.39@5534.83,2660.9 5643.1,2660.9 ; U26.37@5534.83,2700.27 5603.73,2700.27 5623.42,2680.58 ; U27.35@5623.42,2121.17 5623.42,2032.58 ; U26.35@5623.42,2769.17 5623.42,2680.58 ; v1(5628,2226) C119.1@5628,2228.63 ; U27.3@5643.1,1766.83 5643.1,1875.1 ; U26.3@5643.1,2414.83 5643.1,2523.1 ; U27.33@5662.79,2121.17 5662.79,1993.21 ; U26.33@5662.79,2769.17 5662.79,2641.21 ; U27.5@5682.47,1766.83 U27.49@5682.47,1914.47 ; U27.32@5682.47,2121.17 U27.49@5682.47,1973.53 ; U26.5@5682.47,2414.83 U26.49@5682.47,2562.47 ; U26.32@5682.47,2769.17 U26.49@5682.47,2621.53 ; U27.31@5702.16,2121.17 U27.49@5702.16,1953.84 ; U26.31@5702.16,2769.17 U26.49@5702.16,2601.84 ; U27.7@5721.84,1766.83 U27.49@5721.84,1934.16 ; U27.30@5721.84,2121.17 U27.49@5721.84,1953.84 ; U26.7@5721.84,2414.83 U26.49@5721.84,2582.16 ; U26.30@5721.84,2769.17 U26.49@5721.84,2601.84 ; U27.28@5761.21,2121.17 5761.21,1993.21 ; U26.28@5761.21,2769.17 5761.21,2641.21 ; U27.11@5800.58,1766.83 5800.58,1855.42 ; U27.26@5800.58,2121.17 5800.58,2032.58 5780.9,2012.9 ; U26.11@5800.58,2414.83 5800.58,2503.42 ; U26.26@5800.58,2769.17 5800.58,2680.58 5780.9,2660.9 ; U27.14@5889.17,1855.42 5800.58,1855.42 ; U27.15@5889.17,1875.1 5780.9,1875.1 ; U27.17@5889.17,1914.47 U27.49@5741.53,1914.47 ; U27.22@5889.17,2012.9 5780.9,2012.9 ; U26.14@5889.17,2503.42 5800.58,2503.42 ; U26.15@5889.17,2523.1 5780.9,2523.1 ; U26.17@5889.17,2562.47 U26.49@5741.53,2562.47 ; U26.22@5889.17,2660.9 5780.9,2660.9 ; C116.2@6027.37,2034 6024,2034 v1(6024,2058) 6024,2078.63 R94.2@6027.37,2082 ; C113.2@6027.37,2682 6024,2682 v1(6024,2706) 6024,2726.63 R92.2@6027.37,2730 ; C88.1@6066,2850 6071.72,2844.28 C88.1@6071.72,2837.72 ; C88.1@6071.72,2836.17 C88.1@6071.72,2837.72 ; v1(6072,2838) C88.1@6071.72,2837.72 ; v1(6101.72,2980.17) 6104.77,2977.12 U24.4@6104.77,2972.68 ; R107.2@6120,1971.37 6153.37,1971.37 6156,1974 R106.2@6162,1971.37 6201.37,1971.37 C127.2@6204,1974 ; v1(6120,2622) 6122.63,2619.37 R105.2@6162,2619.37 6201.37,2619.37 C125.2@6204,2622 ; v1(6204,1968) C127.2@6204,1971.37 C127.2@6204,1974 ; C126.2@6204,2024.63 C127.2@6204,1974 ; C125.2@6204,2616 C125.2@6204,2619.37 C125.2@6204,2622 ; C124.2@6204,2672.63 v1(6204,2670) C125.2@6204,2622 ; U31.13@6558.61,690 v1(6720,690) ; C137.1@7214.63,666 v1(7218,666) ; v1(7362,2778) U28.14@7362,2846.22 ; C134.1@7512,2456.63 v1(7512,2460) ; v1(7536,816) U29.14@7604.22,816 ; v1(7536,3000) C133.1@7536,3003.37 ; U30.13@7614,1824.61 v1(7614,1986) ; C159.1@7713.37,876 7713.37,915.37 v1(7716,918) R157.1@7713.37,918 ; U33.8@7744.05,2982.43 7787.57,2982.43 v1(7794,2976) ; U33.2@7744.05,3135.98 7784.02,3135.98 v1(7794,3126) ; v1(7758,642) C136.1@7761.37,642 ; U34.13@7864.05,881.2 7901.2,881.2 v1(7902,882) ; U34.9@7864.05,983.57 7913.57,983.57 v1(7914,984) ; v1(7950,2982) 7950.43,2982.43 U33.9@7999.95,2982.43 ; v1(7950,3084) 7950.8,3084.8 U33.13@7999.95,3084.8 ; v1(8070,834) 8073.98,830.02 U34.2@8119.95,830.02 ; v1(8070,984) 8070.43,983.57 U34.8@8119.95,983.57 ; C167.2@8133.37,3054 v1(8136,3054) ; C166.2@8133.37,3126 v1(8136,3126) ; C168.2@8133.37,3168 v1(8136,3168) ; C170.1@8253.37,990 v1(8250,990) 8253.37,993.37 R164.1@8253.37,1038 ; R166.1@8268,854.63 v1(8268,858) ; 5623.42,1855.42 5643.1,1875.1 ; 5623.42,2032.58 5643.1,2012.9 ; 5623.42,2503.42 5643.1,2523.1 ; 5623.42,2680.58 5643.1,2660.9 ; 5643.1,1875.1 U27.49@5682.47,1914.47 ; 5643.1,2012.9 5662.79,1993.21 ; 5643.1,2523.1 U26.49@5682.47,2562.47 ; 5643.1,2660.9 5662.79,2641.21 ; 5662.79,1993.21 U27.49@5682.47,1973.53 ; 5662.79,2641.21 U26.49@5682.47,2621.53 ; U27.49@5682.47,1914.47 U27.49@5712,1944 ; U27.49@5682.47,1973.53 U27.49@5702.16,1953.84 ; U26.49@5682.47,2562.47 U26.49@5712,2592 ; U26.49@5682.47,2621.53 U26.49@5702.16,2601.84 ; U27.49@5702.16,1953.84 U27.49@5712,1944 ; U26.49@5702.16,2601.84 U26.49@5712,2592 ; U27.49@5712,1944 U27.49@5721.84,1934.16 ; U27.49@5712,1944 U27.49@5721.84,1953.84 ; U26.49@5712,2592 U26.49@5721.84,2582.16 ; U26.49@5712,2592 U26.49@5721.84,2601.84 ; U27.49@5721.84,1934.16 U27.49@5741.53,1914.47 ; U27.49@5721.84,1953.84 5761.21,1993.21 ; U26.49@5721.84,2582.16 U26.49@5741.53,2562.47 ; U26.49@5721.84,2601.84 5761.21,2641.21 ; U27.49@5741.53,1914.47 5780.9,1875.1 ; U26.49@5741.53,2562.47 5780.9,2523.1 ; 5761.21,1993.21 5780.9,2012.9 ; 5761.21,2641.21 5780.9,2660.9 ; 5780.9,1875.1 5800.58,1855.42 ; 5780.9,2523.1 5800.58,2503.42
  Bottom Layer, Bottom w5.98: C161.1@8028,876 v1(8028,918)
  Bottom Layer, Bottom w9.84: J35.2@4783.86,2200 4900,2200 4968,2268 C165.2@4968,2268.17 ; R153.1@5156.63,1098 5156.63,1142.63 C156.1@5160,1146 ; C156.1@5156.63,1146 C156.1@5160,1146 ; v1(5166,1146) C156.1@5160,1146 ; C157.2@5271.37,1044 v1(5280,1044) ; C101.1@5577.37,1932 5694,1932 5706,1944 U27.49@5712,1944 ; C89.1@5577.37,2580 U26.49@5700,2580 ; C108.1@5622,1809.37 5622,1854 5664,1896 ; C96.1@5622,2457.37 5622,2502 5664,2544 ; C85.1@5634,1424.63 5679.37,1424.63 v1(5682,1422) R91.1@5682,1424.63 5685.37,1424.63 C87.2@5730,1380 ; C112.1@5646,2078.63 5646,2010 U27.49@5712,1944 ; C100.1@5646,2726.63 5646,2658 U26.49@5712,2592 ; C111.1@5664,1809.37 5664,1896 ; C93.1@5664,2457.37 5664,2544 ; C102.1@5706,1809.37 U27.49@5706,1938 ; C95.1@5706,2457.37 U26.49@5706,2586 ; C87.2@5730,1380.17 C87.2@5730,1380 ; C105.1@5736,2078.63 U27.49@5736,1968 ; C92.1@5736,2726.63 U26.49@5736,2616 ; C86.1@5778,1424.63 5774.63,1424.63 C87.2@5730,1380 ; C104.1@5778,2078.63 5778,2010 ; C91.1@5778,2726.63 5778,2658 ; C103.1@5820,2078.63 5820,2052 5778,2010 ; C90.1@5820,2726.63 5820,2700 5778,2658 ; C107.1@5846.63,1836 5820,1836 5772,1884 ; C109.1@5846.63,1884 5772,1884 ; C106.1@5846.63,1926 U27.49@5730,1926 ; C110.1@5846.63,1968 U27.49@5736,1968 ; C94.1@5846.63,2484 5820,2484 5772,2532 ; C99.1@5846.63,2532 5772,2532 ; C98.1@5846.63,2574 U26.49@5730,2574 ; C97.1@5846.63,2616 U26.49@5736,2616 ; C83.1@5981.72,2892.8 v1(5981.72,2896.17) ; v1(6035.72,2896.17) C84.1@6035.72,2898.8 ; C190.1@6722.63,690 v1(6720,690) ; v1(6798,570) R139.1@6800.63,570 ; R133.1@6800.63,642 C152.1@6723.37,642 6723.37,686.63 v1(6720,690) ; C145.1@6800.63,738 C153.1@6723.37,738 6723.37,693.37 v1(6720,690) ; v1(7362,2778) C132.1@7364.63,2778 ; v1(7440,600) R119.1@7440,602.63 ; v1(7524,546) C139.1@7527.37,546 ; C135.1@7536,813.37 v1(7536,816) ; C144.1@7566,2066.63 C151.1@7566,1989.37 7610.63,1989.37 v1(7614,1986) ; R116.1@7575.37,2682 v1(7578,2682) ; C189.1@7614,1988.63 v1(7614,1986) ; v1(7632,2766) C138.1@7632,2769.37 ; R131.1@7662,2066.63 C150.1@7662,1989.37 7617.37,1989.37 v1(7614,1986) ; C164.1@7680,3111.37 R162.1@7728,3111.37 7779.37,3111.37 v1(7794,3126) ; v1(7734,2064) R137.1@7734,2066.63 ; C162.1@8025.37,834 v1(8070,834) ; C161.1@8025.37,876 C161.1@8028,876 ; C163.1@8025.37,918 v1(8028,918) ; J34.1@8232,1870 8238,1872 8238,1880.63 C171.1@8286,1928.63 ; v1(8382,2952) J36.2@8382,3006 v1(8382,3060) ; 5664,1896 U27.49@5706,1938 ; 5664,2544 U26.49@5700,2580 ; U26.49@5700,2580 U26.49@5706,2586 ; U27.49@5706,1938 U27.49@5712,1944 ; U26.49@5706,2586 U26.49@5712,2592 ; U27.49@5712,1944 U27.49@5730,1926 ; U27.49@5712,1944 U27.49@5736,1968 ; U26.49@5712,2592 U26.49@5730,2574 ; U26.49@5712,2592 U26.49@5736,2616 ; U27.49@5730,1926 5772,1884 ; U26.49@5730,2574 5772,2532 ; U27.49@5736,1968 5778,2010 ; U26.49@5736,2616 5778,2658
  Bottom Layer, Bottom w16.38: v1(8382,882) J38.2@8382,936 v1(8382,990)
  other v1: 5778,1422 5940,2196
4_IO_UPDATE: J35.16 U26.1 U27.1 | length 1702.9
  Top Layer, Top w9.84: J35.16@4783.86,1500 4830,1500 5096.83,1766.83 v1@5460,1766.83 ; v1(5460,1770) v1@5460,1766.83 ; v1(5490,2412) 5492.83,2414.83 U26.1@5603.73,2414.83 ; U27.1@5603.73,1766.83 v1@5460,1766.83
  Bottom Layer, Bottom w9.84: v1(5460,1770) 5460,2382 v1(5490,2412)
4_MIX0: C140.2 R130.1 R131.2 U30.3 | length 270.9
  Top Layer, Top w5.98: R130.1@7614,2388 R130.1@7614,2391.37
  Top Layer, Top w9.84: R130.1@7614,2388 7614,2382 7668,2328 C140.2@7668,2312.63 7668,2310 7664,2306 U30.3@7664,2238 7664,2150 v1(7662,2148)
  Bottom Layer, Bottom w9.84: R131.2@7662,2145.37 v1(7662,2148)
4_MIX1: C141.2 R132.1 R133.2 U31.3 | length 502.7
  Top Layer, Top w9.84: v1(6882,642) 6884,640 U31.3@6972,640 7072,640 7122,690 R132.1@7125.37,690 7134,690 7170,654 7170,528 7182,516 C141.2@7214.63,516
  Bottom Layer, Bottom w9.84: R133.2@6879.37,642 v1(6882,642)
4_RESET: J35.8 U26.36 U27.36 | length 1839.2
  Top Layer, Top w9.84: J35.8@4783.86,1900 4828,1900 v1(5046,2118) 5046,2289.17 5526,2769.17 U26.36@5603.73,2769.17 ; v1(5490,2118) 5493.17,2121.17 U27.36@5603.73,2121.17
  Mid-Layer 2, VCC w9.84: v1(5430,2118) v1(5490,2118)
  Bottom Layer, Bottom w9.84: v1(5046,2118) v1(5430,2118)
4_S_RX: J35.26 U34.1 | length 3715.6
  Top Layer, Top w9.84: J35.26@4783.86,1000 5339.86,444 7758,444 8118,804 U34.1@8119.95,804.43
4_S_TX: J35.6 U33.1 | length 3556.6
  Top Layer, Top w9.84: J35.6@4783.86,2000 4826,2000 4962,2136 4962,2274 5891.32,3203.32 7698.68,3203.32 7740,3162 U33.1@7744.05,3161.57
4_SCLK: J35.10 U26.40 U27.40 | length 1714.4
  Top Layer, Top w6: v1(5490,2010) 5506.79,1993.21 U27.40@5534.83,1993.21
  Top Layer, Top w9.84: J35.10@4783.86,1800 4830,1800 v1(5076,2046) 5076,2275.21 5442,2641.21 U26.40@5534.83,2641.21
  Mid-Layer 2, VCC w9.84: v1(5430,2010) v1(5490,2010)
  Bottom Layer, Bottom w9.84: v1(5076,2046) 5112,2010 v1(5430,2010)
4_SYNC: U26.45 U27.44 | length 759.7
  Top Layer, Top w9.84: U27.44@5534.83,1914.47 5508.47,1914.47 5502,1908 5472,1908 5460,1920 5460,2508 5494.79,2542.79 U26.45@5534.83,2542.79
5_10V: C174.2 C176.2 C182.2 C183.1 C184.1 C185.1 C188.2 J39.2 R172.2 R178.2 R180.1 R182.1 R184.1 R188.1 R190.1 R192.1 U35.8 U36.8 U37.11 U37.15 U37.16 U38.8 | length 595.6
  Top Layer, Top w7.87: U35.8@5232.87,6484.45 5245.08,6484.45 v1(5256.89,6496.26) ; v1(5791.2,6766.95) U36.8@5887.07,6766.95 ; U37.16@5815.75,6402.43 5838.65,6402.43 5864.24,6428.02 ; U37.15@5815.75,6428.02 5864.24,6428.02 ; U37.11@5815.75,6530.39 5864.87,6530.39 v1(5917.17,6582.68) ; v1(5911.18,6427.09) 5910.24,6428.02 5864.24,6428.02 ; v1(6103.2,6766.95) U38.8@6199.07,6766.95
  Bottom Layer, Bottom w7.87: C176.2@5241.54,6496.26 v1(5256.89,6496.26) ; v1(5316.93,6616.34) R172.2@5320.28,6616.34 ; v1(5683.13,6839) R180.1@5683.13,6842.35 ; v1(5791.2,6766.95) C182.2@5791.2,6770.3 ; R184.1@5899.28,6631.52 v1(5899.28,6634.87) ; v1(5899.28,6839) R182.1@5899.28,6842.35 ; C183.1@5913.7,6385.2 5913.7,6424.57 v1(5911.18,6427.09) C185.1@5913.7,6427.09 ; C184.1@5913.7,6582.68 v1(5917.17,6582.68) ; v1(5995.13,6839) R188.1@5995.13,6842.35 ; v1(6103.2,6766.95) C188.2@6103.2,6770.3 ; R178.2@6114.65,6634.02 v1(6114.65,6636.54) ; R192.1@6211.28,6631.52 v1(6211.28,6634.87) ; v1(6211.28,6839) R190.1@6211.28,6842.35
  other v1: 4968.7,6388.19 4968.7,6712.4
5_DET: C179.1 R195.2 U38.7 | length 286.6
  Top Layer, Top w7.87: U38.7@6199.07,6741.36 6235.06,6741.36 v1(6261.7,6768)
  Mid-Layer 2, VCC w7.87: v1(6261.7,6768) 6222.36,6728.66 6222.36,6678.43 6264.25,6636.54 v1(6264.25,6594.65)
  Bottom Layer, Bottom w7.87: v1(6261.7,6768) R195.2@6261.7,6771.37 ; C179.1@6264.25,6592.13 v1(6264.25,6594.65)
5_GND: C174.1 C175.1 C176.1 C178.1 C180.1 C182.1 C183.2 C184.2 C185.2 C188.1 J39.1 J40.1 J42.1 R173.1 R179.1 R181.1 R183.1 R185.1 R189.1 R191.1 R193.1 U35.4 U36.4 U37.1 U37.2 U37.8 U37.9 U37.13 U38.4 | length 887.5
  Top Layer, Top w7.87: U35.4@5156.1,6676.38 5156.1,6621.06 v1(5196.85,6580.31) ; U36.4@5695.14,6690.18 5786.48,6690.18 v1(5791.2,6694.91) ; U37.13@5815.75,6479.2 5852.91,6479.2 v1(5853.7,6480) ; U37.9@5815.75,6581.57 5856.21,6581.57 v1(5857.32,6582.68) ; v1(5988.98,6427.09) 5989.91,6428.02 6023.94,6428.02 ; v1(5994.96,6582.68) 5996.07,6581.57 U37.8@6071.65,6581.57 ; U38.4@6007.14,6690.18 6098.48,6690.18 v1(6103.2,6694.91) ; U37.1@6071.65,6402.43 6049.54,6402.43 6023.94,6428.02 ; U37.2@6071.65,6428.02 6023.94,6428.02
  Bottom Layer, Bottom w7.87: C175.1@5073.43,6496.26 v1(5076.77,6496.26) ; J42.1@5088.74,6832.48 v1(5124.8,6832.48) J40.1@5160.87,6832.48 ; C176.1@5320.28,6496.26 5320.28,6528.94 v1(5316.93,6532.28) 5320.28,6535.63 R173.1@5320.28,6556.3 ; C178.1@5349.61,6832.48 v1(5352.95,6832.48) ; R181.1@5683.13,6631.52 v1(5683.13,6634.87) ; C182.1@5791.2,6691.56 v1(5791.2,6694.91) ; R185.1@5851.24,6631.52 v1(5851.24,6634.87) ; v1(5851.24,6839) R183.1@5851.24,6842.35 ; C183.2@5992.44,6385.2 5992.44,6423.62 v1(5988.98,6427.09) C185.2@5992.44,6427.09 ; C184.2@5992.44,6582.68 v1(5994.96,6582.68) ; R189.1@5995.13,6631.52 v1(5995.13,6634.87) ; C188.1@6103.2,6691.56 v1(6103.2,6694.91) ; R179.1@6114.65,6387.72 6117.17,6385.2 v1(6144.57,6385.2) 6171.97,6385.2 C180.1@6174.49,6387.72 ; R193.1@6163.24,6631.52 v1(6163.24,6634.87) ; v1(6163.24,6839) R191.1@6163.24,6842.35
  other v1: 4968.7,6508.27 4968.7,6592.32
6_GND: D19.2 D21.2 J44.2
6_IN1: D18.2 D19.1 J43.1
6_IN2: D20.2 D21.1 J43.2
6_OUT: D18.1 D20.1 J44.1
NET00000: C175.2 R170.2 R171.2 R172.1 R173.2 U35.3 U35.5 | length 430.5
  Top Layer, Top w7.87: v1(5136.81,6496.26) 5148.62,6484.45 U35.5@5156.1,6484.45 ; U35.3@5181.69,6676.38 5181.69,6643.5 5208.86,6616.34 v1(5244.88,6616.34)
  Bottom Layer, Bottom w7.87: v1(5136.81,6496.26) C175.2@5152.17,6496.26 5152.17,6552.95 5148.82,6556.3 R170.2@5152.17,6556.3 ; R171.2@5152.17,6616.34 5148.82,6616.34 5152.17,6612.99 R170.2@5152.17,6556.3 ; R172.1@5241.54,6616.34 v1(5244.88,6616.34) 5241.54,6612.99 R173.2@5241.54,6556.3 R170.2@5152.17,6556.3
NET00001: D7.1 Q2.3 S1.2 | length 328.2
  Bottom Layer, Bottom w19.68: Q2.3@1891.61,5765.24 1968.13,5841.76 2013.65,5841.76 D7.1@2029.4,5837.83 2029.4,5696.88 S1.2@2041.61,5684.68
NET00002: J11.2 U4.2 U4.3
NET00003: C121.2 C125.1 R104.1 R105.1 | length 133.4
  Top Layer, Top w9.84: C121.2@6072,2544 6075.37,2540.63 C121.2@6078,2540.63 R104.1@6120,2540.63 R105.1@6162,2540.63 C125.1@6204,2540.63
NET00004: R49.1 R51.2 U15.2 | length 128.9
  Bottom Layer, Bottom w9.84: R49.1@1013.37,1529 1074.98,1529 1075.98,1530 U15.2@1076,1531 1124.98,1531 1135.98,1520 R51.2@1136,1520.37
NET00005: C121.1 R98.1 R99.1 U26.20 | length 215.4
  Top Layer, Top w6: U26.20@5889.17,2621.53 5909.53,2621.53 5928,2640 5982,2640 5994,2628 R99.1@5994,2619.37 6033.37,2619.37 6036,2622 R98.1@6036,2619.37 6042,2622 6044.63,2619.37 C121.1@6078,2619.37